# Altium PCB ESP32-S3-WROOM-1-BREAKOUT.PcbDoc
Units mm, origin at the board's own origin, x right, y up, seen from the top; angles counter-clockwise.
Board outline 25.46 x 50.86 mm, 2 copper layers (Top Layer, Bottom Layer), stack 1.57 mm thick; 11 components, 43 nets, 120 pads, 60 vias.
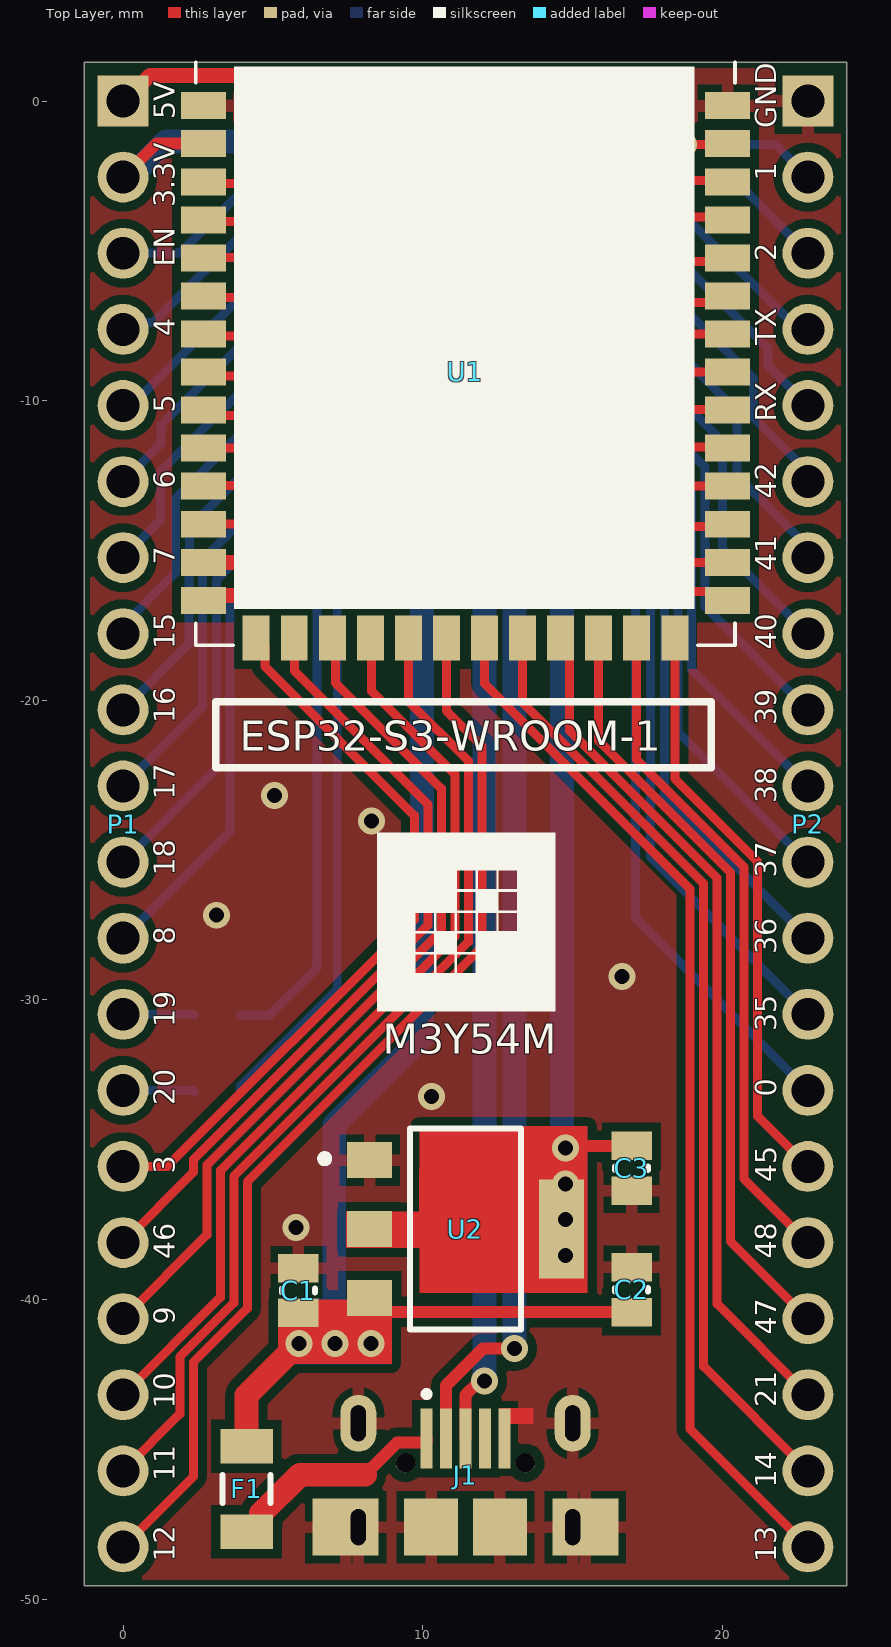
[diagram p0: Top Layer view]
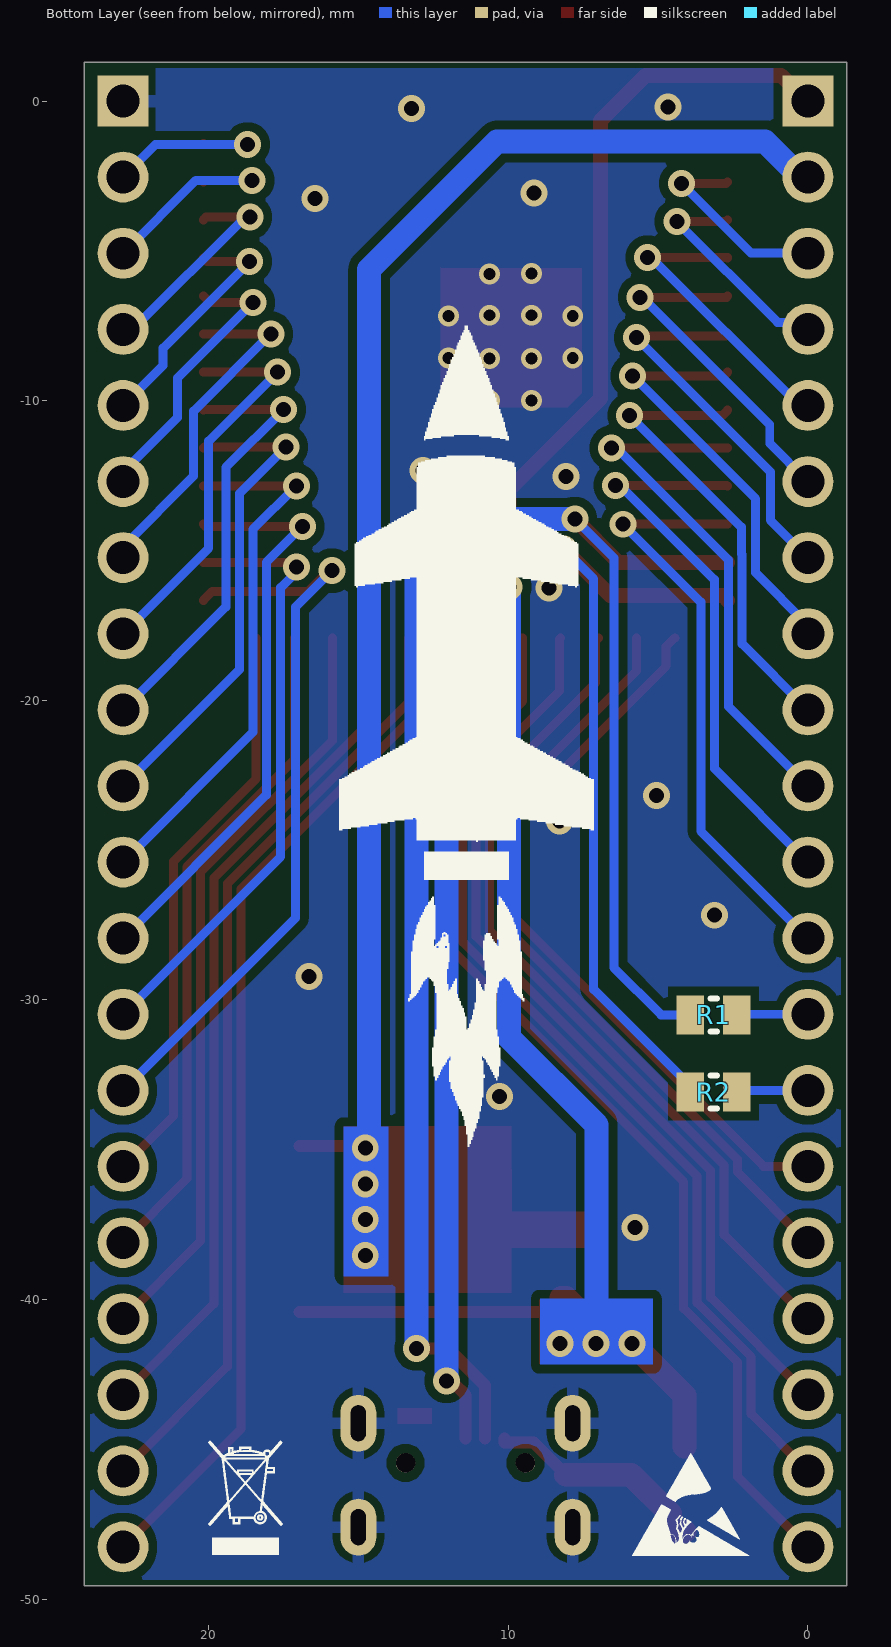
[diagram p1: Bottom Layer view, seen from below]
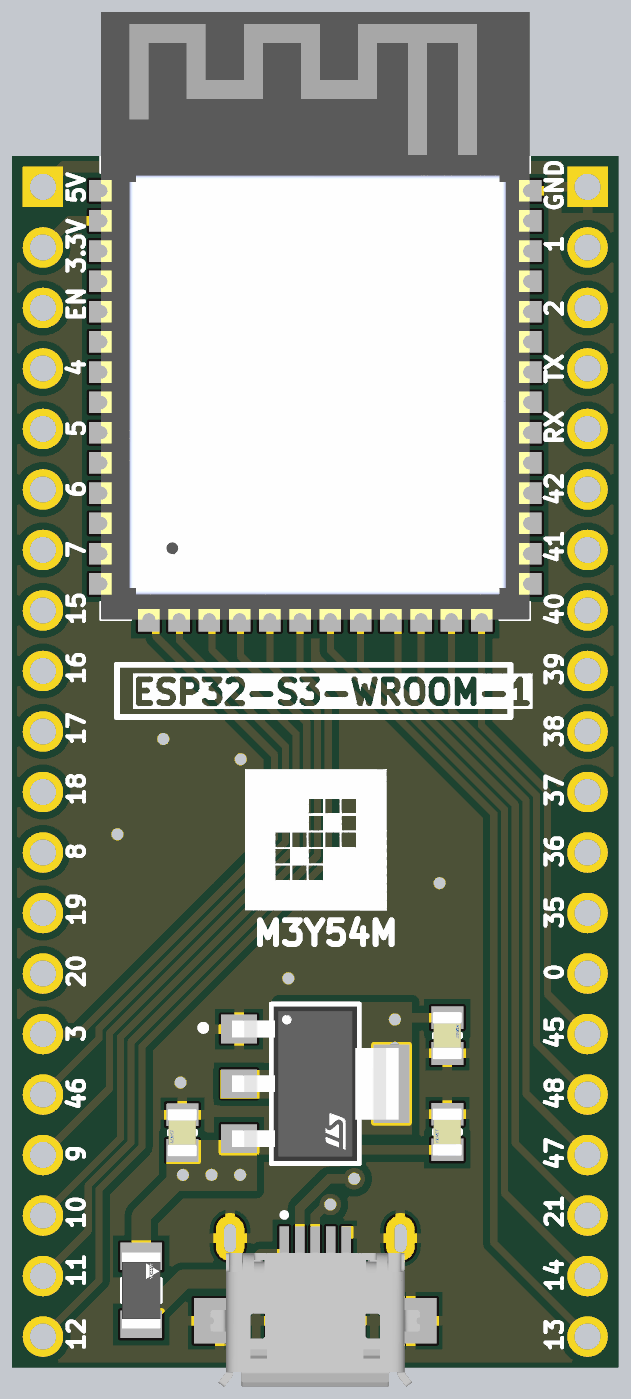
[diagram p2: 3D render of the assembled board from above, using the file's embedded part models]

## Layer stack, top to bottom
Top Solder: solder mask 0.015, Solder Resist, Dk 3.5
Top Layer: signal copper 0.035
Dielectric 1: dielectric 1.5, FR-4, Dk 4.2
Bottom Layer: signal copper 0.035
Bottom Solder: solder mask 0.015, Solder Resist, Dk 3.5

## Board outline
-1.3,-49.56 24.16,-49.56 24.16,1.3 -1.3,1.3

## Design rules (kind name [scope] priority, off if disabled: settings)
BoardOutlineClearance [All] p1: gap=0.2 ignorepadtopadclearanceinfootprint=FALSE
Clearance Clearance_Polygon_Fiducials [All vs InComponent('FID?')] p1: gap=1.3 ignorepadtopadclearanceinfootprint=FALSE
Clearance Clearance_Polygon [InPolygon] p2: gap=0.3 ignorepadtopadclearanceinfootprint=FALSE
Clearance [All] p3: gap=0.15 ignorepadtopadclearanceinfootprint=FALSE except(0: Arc-Hole Track-Hole SMDPad-Hole THPad-Hole Via-Hole Fill-Hole Poly-Hole Region-Hole Text-Hole)
HoleSize [All] p1: absolutevalues=TRUE maxlimit=3.5 minlimit=0.3 maxpercent=80.000 minpercent=20.000
MinimumSolderMaskSliver [All] p1: minsoldermaskwidth=0.15
PolygonConnect PolygonConnect_Via [IsVia] p1: connectstyle=Direct reliefconductorwidth=0.4 reliefentries=4 polygonreliefangle="90 Angle" airgapwidth=0.25
PolygonConnect [All] p2: connectstyle=Relief reliefconductorwidth=0.4 reliefentries=4 polygonreliefangle="90 Angle" airgapwidth=0.25
RoutingVias [All] p1: holewidth=0.4 width=0.7 viastyle="Through Hole" minholewidth=0.4 minwidth=0.6 maxholewidth=2 maxwidth=3
SilkToSilkClearance [All] p1: silktosilkclearance=0.15
SilkToSolderMaskClearance [IsPad] p1: minsilkscreentomaskgap=0.1 clearancetoexposedcopper=TRUE
SolderMaskExpansion SolderMaskExpansion_Via [IsVia] p1: expansion=0.102 istentingtop=TRUE soldermaskfromhole=TRUE
SolderMaskExpansion [All] p2: expansion=0.102 istentingtop=FALSE
Width [All] p1: maxlimit=2 minlimit=0.25 preferedwidth=0.3
26 further rules are at their usual default settings.

## Components (designator, comment, footprint, x,y, rotation, side; value= is the part's Value field where it differs from the comment)
C1 "C0805C104K5RAC7411" C0805 5.85,-39.7 r90 top value=10uF_50V
C2 "C0805C104K5RAC7411" C0805 16.975,-39.675 r90 top value=100nF_50V
C3 "C0805C104K5RAC7411" C0805 16.975,-35.625 r270 top value=10uF_50V
F1 "NANOSMDC020F-2" R1206 4.125,-46.325 r90 top value=200mA_24V_PTC
J1 "629105150921" CON-MICRO-USB-B-SMD-WITH-HOLDER 11.43,-47.6 r0 top
P1 "CON-HDR-1X20" CON-HDR-1X20-2.54 0,0 r270 top
P2 "CON-HDR-1X20" CON-HDR-1X20-2.54 22.86,0 r270 top
R1 "CRG0805F10K" R0805 3.15,-30.5 r0 bottom value=100
R2 "CRG0805F10K" R0805 3.15,-33.075 r0 bottom value=100
U1 "ESP32-S3-WROOM-1-N16R2" ESP32-S3-WROOM-1_NO-KEEPOUT 11.43,-5.415 r0 top
U2 "AMS1117-3.3" SOT-223 11.43,-37.65 r0 top

## Footprints (in the part's own frame and the unit in brackets; to place one, negate y for a bottom-side part, rotate by r counter-clockwise, add the part's x,y. Pads: shape width x height; smd on the part's side, far side on the other; paste and mask are expansions set on the pad)
C0805 [mm] "FP-C0805C-DN-MFG"
  rect 0.95x1.35 smd: 1(-0.75,0) 2(0.75,0)
  silkscreen extent -0.06,-0.55 0.06,0.55, body extent -1.4,-0.85 1.4,0.85, height 0.25
CON-HDR-1X20-2.54 [mm] "Connector; Header; 20 Position, 2.54 Pitch"
  rect 1.7x1.7 hole 1.1 paste-1000 mask+0: 1(0,0)
  round 1.7 hole 1.1 paste-1000 mask+0: 2(2.54,0) 3(5.08,0) 4(7.62,0) 5(10.16,0) 6(12.7,0) 7(15.24,0) 8(17.78,0) 9(20.32,0) 10(22.86,0) 11(25.4,0) 12(27.94,0) 13(30.48,0) 14(33.02,0) 15(35.56,0) 16(38.1,0) 17(40.64,0) 18(43.18,0) 19(45.72,0) 20(48.26,0)
CON-MICRO-USB-B-SMD-WITH-HOLDER [mm] "MICRO USB 5P female seat B type 7.2 four-pin board foot length 1.3 with column curling"
  rect 0.4x2 smd: 1(-1.3,2.96) 2(-0.65,2.96) 3(0,2.96) 4(0.65,2.96) 5(1.3,2.96)
  rect 2.2x1.9 smd: Shell(-4,0) Shell(4,0)
  oval 1.2x1.9 hole 0.5 slot 1.2 at 90 deg: Shell(-3.575,0) Shell(-3.575,3.47) Shell(3.575,0) Shell(3.575,3.47)
  rect 1.8x1.9 smd: Shell(-1.15,0) Shell(1.15,0)
  round 0.65 hole 0.65 paste+0 mask+0: ""(-2,2.15) ""(2,2.15)
  silkscreen extent -1.4,4.35 -1.2,4.54, body extent -4.4,-2.77 4.4,2.86, height 2.79
ESP32-S3-WROOM-1_NO-KEEPOUT [mm]
  rect 1.5x0.9 smd: 1(-8.75,5.26) 2(-8.75,3.99) 3(-8.75,2.72) 4(-8.75,1.45) 5(-8.75,0.18) 6(-8.75,-1.09) 7(-8.75,-2.36) 8(-8.75,-3.63) 9(-8.75,-4.9) 10(-8.75,-6.17) 11(-8.75,-7.44) 12(-8.75,-8.71) 13(-8.75,-9.98) 14(-8.75,-11.25) 27(8.75,-11.25) 28(8.75,-9.98) 29(8.75,-8.71) 30(8.75,-7.44) 31(8.75,-6.17) 32(8.75,-4.9) 33(8.75,-3.63) 34(8.75,-2.36) 35(8.75,-1.09) 36(8.75,0.18) 37(8.75,1.45) 38(8.75,2.72) 39(8.75,3.99) 40(8.75,5.26)
  rect 0.9x1.5 smd: 15(-6.985,-12.5) 16(-5.715,-12.5) 17(-4.445,-12.5) 18(-3.175,-12.5) 19(-1.905,-12.5) 20(-0.635,-12.5) 21(0.635,-12.5) 22(1.905,-12.5) 23(3.175,-12.5) 24(4.445,-12.5) 25(5.715,-12.5) 26(6.985,-12.5)
  rect 0.9x0.9 smd: 41_1(-1.5,-2.46) 41_2(-2.9,-2.46) 41_3(-0.1,-2.46) 41_4(-2.9,-3.86) 41_5(-1.5,-3.86) 41_6(-0.1,-3.86) 41_7(-2.9,-1.06) 41_8(-1.5,-1.06) 41_9(-0.1,-1.06)
  silkscreen extent -9,-12.75 9,6.7, body extent -9,-12.75 9,12.75, height 3.25
R0805 [mm] "FP-CRG0805-IPC_C"
  rect 0.906x1.307 smd: 1(-0.776,0) 2(0.776,0)
  silkscreen extent -0.11,-0.55 0.11,0.55, body extent -1,-0.63 1,0.62, height 0.65
R1206 [mm] "FP-CRCW1206-e3-IPC_B"
  rect 1.156x1.758 smd: 1(-1.426,0) 2(1.426,0)
  silkscreen extent -0.47,-0.8 0.47,0.8, body extent -2.25,-1.13 2.25,1.13, height 0.25
SOT-223 [mm]
  rect 1.5x1.2 smd: 1(-3.2,2.3) 2(-3.2,0) 3(-3.2,-2.3)
  rect 1.5x3.3 smd: 4(3.2,0)
  silkscreen extent -4.82,-3.35 1.85,3.35, body extent -4.05,-3.45 4.05,3.45, height 0.25

## Part data
C1 C2 C3: library part CAPACITOR, "C0805 0.10 μF X7R 30ppm/°C 10.00% 50 V", Capacitance=100nF, Manufacturer=KEMET, Package=C0805C-DN, Temperature="-55°C to +125°C", Temperature Characteristic=X7R, Temperature Coefficient=30ppm/°C, Temperature Range High=+125°C, Temperature Range Low=-55°C, Tolerance=0.1, Voltage Rating="50 V", Automotive=No, Category=Cap, ComponentLink2Description=Datasheet, ComponentLink2URL=https://content.kemet.com/datasheets/KEM_C1003_C0G_SMD.pdf, Device Class L1="Passive Components", Device Class L2=Capacitors, Device Class L3="Ceramic Capacitors", Height=0.88mm, Ipc Land Pattern Name=CAPC200125X78, Lead Free=Yes, Manufacturer Part Number=C0805C104K5RAC7411, Material=Ceramic, Octopart=https://octopart.com/c0805c104k5rac7411-kemet-18508045, RoHS=TRUE
F1: library part FUSE-PTC, "FUSE PPTC 200MA (1206) 24V RESETTABLE"
J1: library part CON-MICRO-USB-AB-RCPT-SMD, "Micro USB 2.0 Type AB Receptacle WR-COM, Horizontal, SMT", Contact Resistance=30mOhm, Manufacturer="Wurth Elektronik", Operating Temperature=-40to85degC, Rated Current=1.8A, Working Voltage=30VAC, Connector Type=MicroUSB2.0TypeAB, Datasheet URL=https://katalog.we-online.de/em/datasheet/629105150921.pdf, Gender=Receptacle, Manufacturer URL=http://www.we-online.de, Mounting Technology=SMT, Orientation=Horizontal, Package Reference=629105150921, Packaging=TapeandReel, Part Number=629105150921, Publisher=WurthElektronik
P1 P2: "Pin Header, 20-Pin", LatestRevisionDate=17-Jul-2002, LatestRevisionNote="Re-released for DXP Platform.", Publisher="Altium Limited"
R1 R2: library part RESISTOR, "RES SMD 10K OHM 1% 1/8W 0805", Case/Package=0805, Max Operating Temperature=125°C, Min Operating Temperature=-55°C, Number of Resistors=1, Power Rating=125mW, Resistor Type="Thick Film", Temperature Coefficient=100ppm/°C, Tolerance=1%, Voltage Rating=150V, Depth=1.25mm, ELV=Compliant, Height=0.55mm, Length=2mm, Mount="Surface Mount", Number of Terminations=2, Packaging="Tape and Reel", Radiation Hardening=No, RoHS Compliant=Yes, Series="CRG Series", Technology="THICK FILM", Termination=Solder
U1: library part ESP32-S3-WROOM-1, "Multiprotocol Modules SMD Module, ESP32-S3R8, 3.3V, 8 MB Octal PSRAM Die, 16 MB Quad SPI Flash, PCB Antenna", Package="Module Espressif Systems", Check_prices=https://www.snapeda.com/parts/ESP32-WROOM-32/Espressif+Systems/view-part/?ref=eda, Digi-Key_Part_Number=1965-ESP32-S3-WROOM-1-N16R2TR-ND, MF="Espressif Systems", MPN=ESP32-S3-WROOM-1-N16R2, Price=3.98, SnapEDA_Link=https://www.snapeda.com/parts/ESP32-WROOM-32/Espressif+Systems/view-part/?ref=snap, Supplier=Digikey, Supplier Link=https://www.digikey.com/en/products/detail/espressif-systems/ESP32-S3-WROOM-1-N16R2/16162644
U2: library part LD1117, "IC REG LINEAR 3.3V 800MA SOT223", Case/Package=SOT-223, Dropout Voltage=1.1V, Input Bias Current=5mA, Max Input Voltage=15V, Max Operating Temperature=125°C, Max Output Current=1.3A, Max Output Voltage=3.3V, Max Power Dissipation=12W, Min Input Voltage=5.3V, Min Operating Temperature=-40°C, Output Current=950mA, Output Voltage Accuracy=1%, Package Quantity=1, Quiescent Current=10mA, Accuracy=1%, Contact Plating=Tin, Height=1.8mm, Lead Free="Lead Free", Length=6.5mm, Max Supply Voltage=15V, Min Output Voltage=3.3V, Min Supply Voltage=3.3V, Mount="Surface Mount", Nominal Output Voltage=3.3V, Number of Outputs=1, Number of Pins=4, Number of Regulators=1, Number of Terminals=4, Output Type=Fixed, Output Voltage=3.3V, Packaging="Tape and Reel", Polarity=Positive, Power Dissipation=12W, Radiation Hardening=No, REACH SVHC="No SVHC", Termination=SMD/SMT, Weight=0.01lb, Width=3.5mm

## Via types
v1: diameter 0.9, hole 0.5, Top Layer to Bottom Layer, tented both sides, 48 vias
v2: diameter 0.7, hole 0.4, Top Layer to Bottom Layer, tented both sides, 12 vias

## Nets (pads, with @x,y where several pads share a name; then routed paths per layer and width w, separated by ;. In a path a pad name is that pad's centre, name@x,y a point inside that pad or via, vN(x,y) a via of type N, cw(c..) or ccw(c..) an arc to the next point about the centre after c; other vN are vias at no path point)
+3V3: C3.1 P1.2 U1.2 U2.2 U2.4 | length 54.7
  Top Layer w0.4: P1.2 1.115,-1.425 U1.2 ; U2.4 14.45,-37.47 14.45,-35.109 14.684,-34.875 C3.1
  Bottom Layer w0.8: P1.2 0.244,-2.54 1.434,-1.35 10.375,-1.35 14.65,-5.625 14.65,-34.825 v1(14.775,-34.95)
  other v1: 14.775,-38.525 14.775,-37.333 14.775,-36.142
+5V: C1.1 C2.1 F1.2 P1.1 U2.3 | length 68
  Top Layer w0.4: U2.3 8.705,-40.425 C2.1
  Top Layer w0.5: P1.1 0.6,0.6 0.643,0.6 0.893,0.85 5.425,0.85 6.925,-0.65 6.925,-9.925 9.975,-12.975 v1(9.975,-16.225)
  Top Layer w0.8: F1.2 4.125,-43.2 5.575,-41.75 5.575,-41.475 5.575,-40.525 5.65,-40.45 C1.1 7.58,-40.45 8.08,-39.95 U2.3
  Bottom Layer w0.8: v1@7.05,-41.475 7.05,-34.175 9.975,-31.25 v1(9.975,-16.225)
  other v1: 5.875,-41.475 7.075,-41.475 8.275,-41.475
EN: P1.3 U1.3 | length 6.8
  Top Layer w0.3: U1.3 2.735,-2.75 v1(4.225,-2.75)
  Bottom Layer w0.3: P1.3 1.895,-5.08 v1(4.225,-2.75)
GND: C1.2 C2.2 C3.2 J1.5 J1.Shell P2.1 U1.1 U1.40 U1.41_1 U1.41_2 U1.41_3 U1.41_4 U1.41_5 U1.41_6 U1.41_7 U1.41_8 U1.41_9 U2.1
  other v1: 5.775,-37.6 10.3,-33.225 16.65,-29.225 3.125,-27.175 8.3,-24.025 5.05,-23.175 8.65,-16.25 8.075,-12.525 12.85,-12.325 16.45,-3.25 9.15,-3.075 13.225,-0.25 4.675,-0.2
  other v2: 9.225,-10 10.625,-10 9.225,-8.6 10.625,-8.6 7.85,-8.575 12,-8.575 7.85,-7.175 12,-7.175 9.225,-7.15 10.625,-7.15 10.625,-5.775 9.225,-5.75
GPIO0: P2.14 U1.27 | length 24.9
  Top Layer w0.3: v1(15.889,-15.675) 15.994,-15.675 16.684,-16.365 19.88,-16.365 U1.27
  Bottom Layer w0.3: v1(15.889,-15.675) 17.1,-16.886 17.1,-27.26 P2.14
GPIO1: P2.2 U1.39 | length 6.1
  Top Layer w0.3: v1(18.7,-1.45) 20.155,-1.45 U1.39
  Bottom Layer w0.3: v1(18.7,-1.45) 21.77,-1.45 P2.2
GPIO2: P2.3 U1.38 | length 7
  Top Layer w0.3: v1(18.55,-2.65) 20.135,-2.65 U1.38
  Bottom Layer w0.3: v1(18.55,-2.65) 20.43,-2.65 P2.3
GPIO3: P1.15 U1.15 | length 24.7
  Top Layer w0.3: P1.15 1.483,-35.56 9.725,-27.318 9.725,-23.85 4.736,-18.861 4.736,-18.206 U1.15
GPIO4: P1.4 U1.4 | length 7.6
  Top Layer w0.3: U1.4 2.74,-4.025 v1(4.375,-4.025)
  Bottom Layer w0.3: P1.4 0.229,-7.391 1.009,-7.391 v1(4.375,-4.025)
GPIO5: P1.5 U1.5 | length 10.1
  Top Layer w0.3: U1.5 2.69,-5.225 v1(5.35,-5.225)
  Bottom Layer w0.3: P1.5 0.29,-10.16 5.225,-5.225 v1(5.35,-5.225)
GPIO6: P1.6 U1.6 | length 11.5
  Top Layer w0.3: U1.6 2.725,-6.55 v1(5.6,-6.55)
  Bottom Layer w0.3: P1.6 1.275,-11.425 1.275,-10.8 5.525,-6.55 v1(5.6,-6.55)
GPIO7: P1.7 U1.7 | length 12.8
  Top Layer w0.3: U1.7 2.755,-7.85 5.675,-7.85 v1(5.725,-7.9)
  Bottom Layer w0.3: P1.7 1.25,-13.99 1.25,-12.375 v1(5.725,-7.9)
GPIO8: P1.12 U1.12 | length 19.9
  Top Layer w0.3: U1.12 v1(6.175,-14.125)
  Bottom Layer w0.3: P1.12 3.575,-24.365 3.575,-16.725 v1(6.175,-14.125)
GPIO9: P1.17 U1.17 | length 28.6
  Top Layer w0.3: P1.17 2.8,-37.84 2.8,-35.516 10.625,-27.691 10.625,-22.95 7.089,-19.414 7.089,-18.019 U1.17
GPIO10: P1.18 U1.18 | length 31
  Top Layer w0.3: P1.18 0,-43.177 3.25,-39.927 3.25,-35.702 11.075,-27.877 11.075,-22.475 8.289,-19.689 8.289,-17.949 U1.18
GPIO11: P1.19 U1.19 | length 33.4
  Top Layer w0.3: P1.19 1.9,-43.82 1.9,-41.914 3.7,-40.114 3.7,-35.889 11.525,-28.064 11.525,-22.025 9.525,-20.025 U1.19
GPIO12: P1.20 U1.20 | length 35.8
  Top Layer w0.3: P1.20 2.35,-45.91 2.35,-42.1 4.15,-40.3 4.15,-36.075 11.975,-28.25 11.975,-21.525 10.795,-20.345 U1.20
GPIO13: P2.20 U1.21 | length 34.8
  Top Layer w0.3: U1.21 12.065,-19.447 18.925,-26.307 18.925,-44.325 P2.20
GPIO14: P2.19 U1.22 | length 31.8
  Top Layer w0.3: U1.22 13.335,-20.081 19.375,-26.121 19.375,-42.235 P2.19
GPIO15: P1.8 U1.8 | length 14.3
  Top Layer w0.3: U1.8 2.81,-9.175 v1(5.85,-9.175)
  Bottom Layer w0.3: P1.8 0,-17.489 1.75,-15.739 1.75,-13.275 v1(5.85,-9.175)
GPIO16: P1.9 U1.9 | length 15.6
  Top Layer w0.3: U1.9 2.865,-10.5 v1(5.95,-10.5)
  Bottom Layer w0.3: P1.9 2.2,-18.12 2.2,-15.139 2.225,-15.114 2.225,-14.225 v1(5.95,-10.5)
GPIO17: P1.10 U1.10 | length 18
  Top Layer w0.3: U1.10 2.69,-11.575 v1(6.55,-11.575)
  Bottom Layer w0.3: P1.10 2.65,-20.21 2.65,-15.325 6.4,-11.575 v1(6.55,-11.575)
GPIO18: P1.11 U1.11 | length 19.1
  Top Layer w0.3: U1.11 2.71,-12.825 v1(6.42,-12.825)
  Bottom Layer w0.3: P1.11 3.125,-22.275 3.125,-15.975 6.275,-12.825 v1(6.42,-12.825)
GPIO19: J1.2 R1.2 U1.13 | length 61.1
  Top Layer w0.4: J1.2 10.78,-42.87 12.013,-41.637 v1(13.063,-41.637)
  Top Layer w0.5: U1.13 6.33,-15.395 v1(7.775,-13.95)
  Bottom Layer w0.3: R1.2 4.9,-30.5 6.475,-28.925 6.475,-15.25 v1(7.775,-13.95)
  Bottom Layer w0.8: v1(7.775,-13.95) 11.544,-13.95 13.063,-15.47 v1(13.063,-41.637)
GPIO20: J1.3 R2.2 U1.14 | length 59.5
  Top Layer w0.4: J1.3 11.43,-43.183 11.8,-42.814 11.968,-42.814 v1(12.063,-42.718)
  Top Layer w0.5: U1.14 2.845,-16.5 6.6,-16.5 v1(8.15,-14.95)
  Bottom Layer w0.3: R2.2 3.926,-32.874 4.229,-32.571 7.15,-29.651 7.15,-15.95 v1(8.15,-14.95)
  Bottom Layer w0.8: v1(8.15,-14.95) 11.2,-14.95 12.063,-15.813 v1(12.063,-42.718)
GPIO21: P2.18 U1.23 | length 28.7
  Top Layer w0.3: U1.23 14.905,-18.215 14.905,-21.014 19.825,-25.934 19.825,-40.145 P2.18
GPIO35: P2.13 U1.28 | length 20.5
  Top Layer w0.3: v1(17.068,-15.547) 17.231,-15.547 17.383,-15.395 U1.28
  Bottom Layer w0.3: v1(17.068,-15.547) 17.068,-15.709 17.6,-16.241 17.6,-25.22 P2.13
GPIO36: P2.12 U1.29 | length 19.6
  Top Layer w0.3: v1(16.875,-14.2) 20.105,-14.2 U1.29
  Bottom Layer w0.3: v1(16.875,-14.2) 18.075,-15.4 18.075,-23.155 P2.12
GPIO37: P2.11 U1.30 | length 18.1
  Top Layer w0.3: v1(17.075,-12.85) 20.175,-12.85 U1.30
  Bottom Layer w0.3: v1(17.075,-12.85) 18.525,-14.3 18.525,-21.065 P2.11
GPIO38: P2.10 U1.31 | length 16.3
  Top Layer w0.3: v1(17.425,-11.55) 20.145,-11.55 U1.31
  Bottom Layer w0.3: v1(17.425,-11.55) 18.975,-13.1 18.975,-18.975 P2.10
GPIO39: P2.9 U1.32 | length 14.9
  Top Layer w0.3: v1(17.5,-10.3) 20.165,-10.3 U1.32
  Bottom Layer w0.3: v1(17.5,-10.3) 19.425,-12.225 19.425,-16.885 P2.9
GPIO40: P2.8 U1.33 | length 13.3
  Top Layer w0.3: v1(17.7,-9.05) 20.175,-9.05 U1.33
  Bottom Layer w0.3: v1(17.7,-9.05) 20,-11.35 20,-14.92 P2.8
GPIO41: P2.7 U1.34 | length 11.8
  Top Layer w0.3: v1(17.925,-7.775) U1.34
  Bottom Layer w0.3: v1(17.925,-7.775) 20.5,-10.35 20.5,-12.514 22.86,-14.874 P2.7
GPIO42: P2.6 U1.35 | length 9.5
  Top Layer w0.3: v1(18.525,-6.725) 19.96,-6.725 U1.35
  Bottom Layer w0.3: v1(18.525,-6.725) 21.05,-9.25 21.05,-10.564 22.86,-12.374 P2.6
GPIO45: P2.15 U1.26 | length 19.5
  Top Layer w0.3: U1.26 18.415,-22.615 21.175,-25.375 21.175,-33.875 P2.15
GPIO46: P1.16 U1.16 | length 26.2
  Top Layer w0.3: P1.16 2.35,-35.75 2.35,-35.329 10.175,-27.504 10.175,-23.475 5.725,-19.025 5.725,-17.925 U1.16
GPIO47: P2.17 U1.24 | length 25.6
  Top Layer w0.3: U1.24 15.875,-21.348 20.275,-25.748 20.275,-38.055 P2.17
GPIO48: P2.16 U1.25 | length 22.6
  Top Layer w0.3: U1.25 17.145,-21.981 20.725,-25.561 20.725,-35.965 P2.16
NetF1_1: F1.1 J1.1 | length 7.6
  Top Layer w0.4: 8.075,-45.85 9.15,-44.775 10.13,-44.775 J1.1
  Top Layer w0.8: F1.1 4.426,-47.751 4.604,-47.573 4.604,-47.146 5.9,-45.85 8.075,-45.85
NetP1_13: P1.13 R1.1 | length 2.4
  Bottom Layer w0.3: P1.13 2.354,-30.48 R1.1
NetP1_14: P1.14 R2.1 | length 2.4
  Bottom Layer w0.3: P1.14 2.319,-33.02 R2.1
RXD0: P2.5 U1.36 | length 8.2
  Top Layer w0.3: v1(18.632,-5.357) 20.058,-5.357 U1.36
  Bottom Layer w0.3: v1(18.632,-5.357) 21.525,-8.25 21.525,-8.825 P2.5
TXD0: P2.4 U1.37 | length 7.4
  Top Layer w0.3: v1(18.625,-3.875) 20.09,-3.875 U1.37
  Bottom Layer w0.3: v1(18.625,-3.875) 18.787,-3.875 22.532,-7.62 P2.4
pads on no net: J1. J1.4

## Polygon pours and split planes (outlines as drawn)
GND on Bottom Layer "GND_L02_P001" (solid, remove dead copper, pour order 1): -1.3,-49.56 -1.3,1.3 24.16,1.3 24.16,-49.56
GND on Top Layer "GND_L01_P000" (solid, remove dead copper, pour order 0): -1.3,-49.56 -1.3,1.3 24.16,1.3 24.16,-49.56

## Other copper
Top Layer:
  rectangle net GND: 12.55,-44.15 13.7,-43.625
  rectangle net +5V: 5.175,-42.15 8.975,-40
  region net GND: 12.225,-5.575 12.25,-5.55 12.25,-10.225 8.018,-10.225 7.55,-9.757 7.55,-5.575
  region net +3V3: 7.45,-37.075 9.885,-37.075 9.905,-34.225 15.5,-34.225 15.5,-39.775 9.904,-39.775 9.904,-38.275 9.05,-38.275 7.45,-38.275
Bottom Layer:
  rectangle net +5V: 5.175,-42.175 8.95,-39.975
  rectangle net +3V3: 14,-39.225 15.5,-34.225

## Silkscreen, mask and mechanical layers (free items; w line width, h text height)
Top Overlay:
  drawing of 6 lines, arcs and shapes, not listed
  text "5V" at 1.73,-0.6 h0.7 r90
  text "GND" at 21.805,-0.915 h0.7 r90
  text "1" at 21.805,-2.655 h0.7 r90
  text "3.3V" at 1.73,-3.547 h0.7 r90
  text "2" at 21.805,-5.355 h0.7 r90
  text "EN" at 1.73,-5.53 h0.7 r90
  text "4" at 1.73,-7.847 h0.7 r90
  text "TX" at 21.805,-8.155 h0.7 r90
  text "5" at 1.73,-10.398 h0.7 r90
  text "RX" at 21.805,-10.71 h0.7 r90
  text "6" at 1.73,-12.942 h0.7 r90
  text "42" at 21.805,-13.27 h0.7 r90
  text "7" at 1.73,-15.483 h0.7 r90
  text "41" at 21.805,-15.695 h0.7 r90
  text "15" at 1.73,-18.29 h0.7 r90
  text "40" at 21.805,-18.32 h0.7 r90
  text "16" at 1.73,-20.773 h0.7 r90
  text "39" at 21.805,-20.828 h0.7 r90
  text "ESP32-S3-WROOM-1" at 3.889,-21.682 h1
  text "17" at 1.73,-23.325 h0.7 r90
  text "38" at 21.805,-23.43 h0.7 r90
  text "18" at 1.73,-25.862 h0.7 r90
  text "37" at 21.805,-25.917 h0.7 r90
  text "8" at 1.73,-28.155 h0.7 r90
  text "36" at 21.805,-28.475 h0.7 r90
  text "19" at 1.73,-30.92 h0.7 r90
  text "35" at 21.805,-31.042 h0.7 r90
  text "M3Y54M" at 8.675,-31.8 h1
  text "0" at 21.805,-33.23 h0.7 r90
  text "20" at 1.73,-33.517 h0.7 r90
  text "3" at 1.73,-35.798 h0.7 r90
  text "45" at 21.805,-36.085 h0.7 r90
  text "48" at 21.805,-38.645 h0.7 r90
  text "46" at 1.73,-38.653 h0.7 r90
  text "9" at 1.73,-40.842 h0.7 r90
  text "47" at 21.805,-41.17 h0.7 r90
  text "21" at 21.805,-43.595 h0.7 r90
  text "10" at 1.73,-43.64 h0.7 r90
  text "11" at 1.73,-46.065 h0.7 r90
  text "14" at 21.805,-46.282 h0.7 r90
  text "12" at 1.73,-48.75 h0.7 r90
  text "13" at 21.805,-48.775 h0.7 r90
Bottom Overlay:
  drawing of 10 lines, arcs and shapes, not listed
Mechanical 1:
  the board outline again, w0.1

## Text inside footprints (layer, text, board x,y; h text height)
J1: Top 3D Body "PCB Edge" at 9.906,-49.378 h0.41